# EAGLE board CT_schematic (EAGLE 7.6.0)

Size 100 x 80 mm. Coordinates in mm from the lower left corner, seen from the top.
Outline: 0,0 100,0 100,80 0,80 0,0
Copper layers (1*16): Top 0.035mm / dielectric 1.5mm / Bottom 0.035mm
Design rules "default": minimum track width 10mil, minimum drill 24mil, track to track 8mil, track to pad 8mil, pad to pad 8mil, via to via 8mil, smd to smd 8mil, copper to edge 40mil, drill to drill 8mil, minimum pad ring 10mil, minimum via ring 8mil, stop-mask expansion 4mil, vias tented up to drill 0mil, thermal gap 10mil

## Footprints (pad centres in the part's own frame; a part is rotated, then mirrored left to right if it is on the bottom)
C0603 = smd 0.8 x 0.8: 1 -0.762,0; 2 0.762,0
C0402 = smd 0.5 x 0.5: 1 -0.508,0; 2 0.508,0
C1210 = smd 1.2 x 2.5: 1 -1.524,0; 2 1.524,0
C0805 = smd 1.2 x 1.3: 1 -1.016,0; 2 1.016,0
2220 = smd 1.85 x 5.5: 1 -2.55,0; 2 2.55,0
R0603 = smd 0.8 x 0.8: 1 -0.762,0; 2 0.762,0
EXV-9H = smd 3.505 x 1.676: 1 -2.857,0; 2 2.857,0
L0603 = smd 0.8 x 0.8: 1 -0.762,0; 2 0.762,0
DR1040 = smd 1.6 x 3.2: 1 -4.458,0; 2 4.458,0
PJ-037B_PACKAGE = drill 3.7 square: 1 12,0 | drill 3.2 square: 2 6,0
UFBGA144 = smd 0.32 x 0.32: A1 -2.75,2.75; A2 -2.25,2.75; A3 -1.75,2.75; A4 -1.25,2.75; A5 -0.75,2.75; A6 -0.25,2.75; A7 0.25,2.75; A8 0.75,2.75; A9 1.25,2.75; A10 1.75,2.75; A11 2.25,2.75; A12 2.75,2.75; B1 -2.75,2.25; B2 -2.25,2.25; B3 -1.75,2.25; B4 -1.25,2.25; B5 -0.75,2.25; B6 -0.25,2.25; B7 0.25,2.25; B8 0.75,2.25; B9 1.25,2.25; B10 1.75,2.25; B11 2.25,2.25; B12 2.75,2.25; C1 -2.75,1.75; C2 -2.25,1.75; C3 -1.75,1.75; C4 -1.25,1.75; C5 -0.75,1.75; C6 -0.25,1.75; C7 0.25,1.75; C8 0.75,1.75; C9 1.25,1.75; C10 1.75,1.75; C11 2.25,1.75; C12 2.75,1.75; D1 -2.75,1.25; D2 -2.25,1.25; D3 -1.75,1.25; D4 -1.25,1.25; D5 -0.75,1.25; D6 -0.25,1.25; D7 0.25,1.25; D8 0.75,1.25; D9 1.25,1.25; D10 1.75,1.25; D11 2.25,1.25; D12 2.75,1.25; E1 -2.75,0.75; E2 -2.25,0.75; E3 -1.75,0.75; E4 -1.25,0.75; E5 -0.75,0.75; E6 -0.25,0.75; E7 0.25,0.75; E8 0.75,0.75; E9 1.25,0.75; E10 1.75,0.75; E11 2.25,0.75; E12 2.75,0.75; F1 -2.75,0.25; F2 -2.25,0.25; F3 -1.75,0.25; F4 -1.25,0.25; F5 -0.75,0.25; F6 -0.25,0.25; F7 0.25,0.25; F8 0.75,0.25; F9 1.25,0.25; F10 1.75,0.25; F11 2.25,0.25; F12 2.75,0.25; G1 -2.75,-0.25; G2 -2.25,-0.25; G3 -1.75,-0.25; G4 -1.25,-0.25; G5 -0.75,-0.25; G6 -0.25,-0.25; G7 0.25,-0.25; G8 0.75,-0.25; G9 1.25,-0.25; G10 1.75,-0.25; G11 2.25,-0.25; G12 2.75,-0.25; H1 -2.75,-0.75; H2 -2.25,-0.75; H3 -1.75,-0.75; H4 -1.25,-0.75; H5 -0.75,-0.75; H6 -0.25,-0.75; H7 0.25,-0.75; H8 0.75,-0.75; H9 1.25,-0.75; H10 1.75,-0.75; H11 2.25,-0.75; H12 2.75,-0.75; J1 -2.75,-1.25; J2 -2.25,-1.25; J3 -1.75,-1.25; J4 -1.25,-1.25; J5 -0.75,-1.25; J6 -0.25,-1.25; J7 0.25,-1.25; J8 0.75,-1.25; J9 1.25,-1.25; J10 1.75,-1.25; J11 2.25,-1.25; J12 2.75,-1.25; K1 -2.75,-1.75; K2 -2.25,-1.75; K3 -1.75,-1.75; K4 -1.25,-1.75; K5 -0.75,-1.75; K6 -0.25,-1.75; K7 0.25,-1.75; K8 0.75,-1.75; K9 1.25,-1.75; K10 1.75,-1.75; K11 2.25,-1.75; K12 2.75,-1.75; L1 -2.75,-2.25; L2 -2.25,-2.25; L3 -1.75,-2.25; L4 -1.25,-2.25; L5 -0.75,-2.25; L6 -0.25,-2.25; L7 0.25,-2.25; L8 0.75,-2.25; L9 1.25,-2.25; L10 1.75,-2.25; L11 2.25,-2.25; L12 2.75,-2.25; M1 -2.75,-2.75; M2 -2.25,-2.75; M3 -1.75,-2.75; M4 -1.25,-2.75; M5 -0.75,-2.75; M6 -0.25,-2.75; M7 0.25,-2.75; M8 0.75,-2.75; M9 1.25,-2.75; M10 1.75,-2.75; M11 2.25,-2.75; M12 2.75,-2.75
SOT-23-6 = smd 1.1 x 0.6: 1 -1.4,0.95; 2 -1.4,0; 3 -1.4,-0.95; 4 1.4,-0.95; 5 1.4,0; 6 1.4,0.95
WSON-8-PAD = smd 0.45 x 0.7: 1 -0.75,-0.95; 2 0.52,-0.95; 3 1.79,-0.95; 4 3.06,-0.95; 5 3.06,4.35; 6 1.79,4.35; 7 0.52,4.35; 8 -0.75,4.35 | smd 4 x 3.5: PAD 1.15,1.7
PC28F512P33BFD = smd 0.45 x 0.45: A1 0,0; A2 1,0; A3 2,0; A4 3,0; A5 4,0; A6 5,0; A7 6,0; A8 7,0; B1 0,-1; B2 1,-1; B3 2,-1; B4 3,-1; B5 4,-1; B6 5,-1; B7 6,-1; B8 7,-1; C1 0,-2; C2 1,-2; C3 2,-2; C4 3,-2; C5 4,-2; C6 5,-2; C7 6,-2; C8 7,-2; D1 0,-3; D2 1,-3; D3 2,-3; D4 3,-3; D5 4,-3; D6 5,-3; D7 6,-3; D8 7,-3; E1 0,-4; E2 1,-4; E3 2,-4; E4 3,-4; E5 4,-4; E6 5,-4; E7 6,-4; E8 7,-4; F1 0,-5; F2 1,-5; F3 2,-5; F4 3,-5; F5 4,-5; F6 5,-5; F7 6,-5; F8 7,-5; G1 0,-6; G2 1,-6; G3 2,-6; G4 3,-6; G5 4,-6; G6 5,-6; G7 6,-6; G8 7,-6; H1 0,-7; H2 1,-7; H3 2,-7; H4 3,-7; H5 4,-7; H6 5,-7; H7 6,-7; H8 7,-7
QFN-32 = smd 0.6 x 0.3: 1 -2.3,1.75; 2 -2.3,1.25; 3 -2.3,0.75; 4 -2.3,0.25; 5 -2.3,-0.25; 6 -2.3,-0.75; 7 -2.3,-1.25; 8 -2.3,-1.75; 17 2.3,-1.75; 18 2.3,-1.25; 19 2.3,-0.75; 20 2.3,-0.25; 21 2.3,0.25; 22 2.3,0.75; 23 2.3,1.25; 24 2.3,1.75 | smd 0.3 x 0.6: 9 -1.75,-2.3; 10 -1.25,-2.3; 11 -0.75,-2.3; 12 -0.25,-2.3; 13 0.25,-2.3; 14 0.75,-2.3; 15 1.25,-2.3; 16 1.75,-2.3; 25 1.75,2.3; 26 1.25,2.3; 27 0.75,2.3; 28 0.25,2.3; 29 -0.25,2.3; 30 -0.75,2.3; 31 -1.25,2.3; 32 -1.75,2.3 | smd 3.2 x 3.2: EXP 0,0
SJ-43515TS-SMT-TR = smd 2.2 x 3: 1 0.6,-7.4; 4 3.4,-7.4 | smd 3 x 3: 2 12.8,-7.4; 5 17,-3 | smd 2 x 3: 3 5.3,0; 6 2.5,0 | drill 1.8: P$7 4.5,-3.69; P$8 11.54,-3.69
WM-64PC = drill 0.6 pad 1: 1 -1,0.95; 2 -1,-0.95
MICRO_USB_AB = smd 0.4 x 1.35: 1 1.3,0.26; 2 0.65,0.26; 3 0,0.26; 4 -0.65,0.26; 5 -1.3,0.26 | drill 0.6 pad 0.95 long: 6 4.175,-2.54; 7 -4.175,-2.54 | drill 0.7 pad 1.1 long: 8 -2.225,0.46; 9 2.225,0.46
SOT143B = smd 1 x 0.7: 1 -0.75,-1 | smd 0.6 x 0.7: 2 0.95,-1; 3 0.95,1; 4 -0.95,1
FCI_10118193-0001LF = smd 0.4 x 1.35: 1 -1.3,2.675; 2 -0.65,2.675; 3 0,2.675; 4 0.65,2.675; 5 1.3,2.675 | smd 1.6 x 1.4: 6 -3.2,2.45; 7 3.2,2.45 | smd 1.9 x 1.9: 8 -1.2,0; 9 1.2,0 | hole 0.5: -3.3,0; 3.3,0
ABS07-32.768KHZ-7-T = smd 1.1 x 2.4: 1 -2.5,0; 2 0,0
ASFL1 = smd 1.7 x 1.5: 1 -1.27,-1.1; 2 1.27,-1.1; 3 1.27,1.1; 4 -1.27,1.1
WSON-8 = smd 0.3 x 0.6: 1 -0.75,0; 2 0.05,0; 3 0.85,0; 4 1.65,0; 5 1.65,3.8; 6 0.85,3.8; 7 0.05,3.8; 8 -0.75,3.8 | smd 3 x 2.6: PAD 0.45,1.9
QFN-16_EP = smd 0.805 x 0.3: 1 -1.452,0.75; 2 -1.452,0.25; 3 -1.452,-0.25; 4 -1.452,-0.75; 9 1.452,-0.75; 10 1.452,-0.25; 11 1.452,0.25; 12 1.452,0.75 | smd 0.3 x 0.805: 5 -0.75,-1.452; 6 -0.25,-1.452; 7 0.25,-1.452; 8 0.75,-1.452; 13 0.75,1.452; 14 0.25,1.452; 15 -0.25,1.452; 16 -0.75,1.452 | smd 1.55 x 1.55: 17 0,0
QFN-38_UHF = smd 0.75 x 0.3: 1 -2.4,2.75; 2 -2.4,2.25; 3 -2.4,1.75; 4 -2.4,1.25; 6 -2.4,0.25; 7 -2.4,-0.25; 8 -2.4,-0.75; 9 -2.4,-1.25; 10 -2.4,-1.75; 11 -2.4,-2.25; 12 -2.4,-2.75; 20 2.4,-2.75; 21 2.4,-2.25; 22 2.4,-1.75; 23 2.4,-1.25; 24 2.4,-0.75; 25 2.4,-0.25; 26 2.4,0.25; 27 2.4,0.75; 28 2.4,1.25; 29 2.4,1.75; 30 2.4,2.25; 31 2.4,2.75 | smd 0.758 x 0.3: 5 -2.4,0.75 | smd 0.3 x 0.75: 13 -1.5,-3.4; 14 -1,-3.4; 15 -0.5,-3.4; 16 0,-3.4; 17 0.5,-3.4; 18 1,-3.4; 19 1.5,-3.4; 32 1.5,3.4; 33 1,3.4; 34 0.5,3.4; 35 0,3.4; 36 -0.5,3.4; 37 -1,3.4; 38 -1.5,3.4 | smd 3.2 x 5.2: 39 0,0
IRF8306MTRPBF = smd 0.9 x 1.85: 1 0,0; 2 0,-2.35; 6 6.4,0; 7 6.4,-2.35 | smd 0.75 x 0.75: 3 1.75,-1.175 | smd 1.45 x 0.87: 4 3.5,-0.565; 5 3.5,-1.785
SW_4-1437565-2 = smd 1.4 x 2.1: 1 -2.23,4.55; 2 -2.23,-4.55; 3 2.23,4.55; 4 2.23,-4.55
LGM67K-G1J2-24-Z = smd 0.8 x 1.4: A -2,0; C 0,0
NC7SZ125M5X = smd 1.3 x 0.7: 1 -1.3,0.95; 2 -1.3,0; 3 -1.3,-0.95; 4 1.3,-0.95; 5 1.3,0.95

## Placement (x,y rotation side)
C1  1e-06  [C0603]  -41.91,80.01 0 top  (outside the outline)
C2  1e-07  [C0603]  -45.72,80.01 0 top  (outside the outline)
C3  1e-07  [C0603]  -49.53,80.01 0 top  (outside the outline)
C4  1e-07  [C0603]  -53.34,80.01 0 top  (outside the outline)
C5  1e-07  [C0603]  -57.15,80.01 0 top  (outside the outline)
C6  1e-07  [C0603]  -60.96,80.01 0 top  (outside the outline)
C7  1e-07  [C0603]  -64.77,80.01 0 top  (outside the outline)
C8  1e-07  [C0603]  -68.58,80.01 0 top  (outside the outline)
C9  1e-07  [C0603]  -72.39,80.01 0 top  (outside the outline)
C10  1e-07  [C0603]  -76.2,80.01 0 top  (outside the outline)
C11  1e-07  [C0603]  -80.01,80.01 0 top  (outside the outline)
C12  1e-07  [C0603]  -83.82,80.01 0 top  (outside the outline)
C13  1e-07  [C0603]  -87.63,80.01 0 top  (outside the outline)
C14  4.7e-06  [C0603]  -34.29,80.01 0 top  (outside the outline)
C15  1e-08  [C0603]  -91.44,80.01 0 top  (outside the outline)
C16  1e-06  [C0603]  -15.24,85.09 0 top  (outside the outline)
C17  1e-07  [C0603]  -19.05,85.09 0 top  (outside the outline)
C18  1e-07  [C0603]  -22.86,85.09 0 top  (outside the outline)
C19  1e-07  [C0603]  -26.67,85.09 0 top  (outside the outline)
C20  1e-11  [C0402]  -45.72,90.17 0 top  (outside the outline)
C21  1e-11  [C0402]  -49.53,90.17 0 top  (outside the outline)
C23  1e-06  [C0603]  -30.48,85.09 0 top  (outside the outline)
C24  1e-07  [C0402]  -53.34,90.17 0 top  (outside the outline)
C25  1e-08  [C0402]  -57.15,90.17 0 top  (outside the outline)
C26  1e-07  [C0402]  -60.96,90.17 0 top  (outside the outline)
C27  1e-08  [C0402]  -64.77,90.17 0 top  (outside the outline)
C28  1e-07  [C0402]  -68.58,90.17 0 top  (outside the outline)
C29  1e-08  [C0402]  -72.39,90.17 0 top  (outside the outline)
C30  1e-06  [C0603]  -34.29,85.09 0 top  (outside the outline)
C31  1e-06  [C0603]  -38.1,85.09 0 top  (outside the outline)
C32  1e-06  [C0603]  -41.91,85.09 0 top  (outside the outline)
C33  1e-06  [C0603]  -45.72,85.09 0 top  (outside the outline)
C34  1e-06  [C0603]  -49.53,85.09 0 top  (outside the outline)
C35  1e-06  [C0603]  -53.34,85.09 0 top  (outside the outline)
C36  1e-06  [C0603]  -57.15,85.09 0 top  (outside the outline)
C37  1e-07  [C0402]  -76.2,90.17 0 top  (outside the outline)
C38  1e-07  [C0402]  -80.01,90.17 0 top  (outside the outline)
C39  1e-07  [C0402]  -83.82,90.17 0 top  (outside the outline)
C40  1e-07  [C0402]  -87.63,90.17 0 top  (outside the outline)
C41  1e-06  [C0603]  -60.96,85.09 0 top  (outside the outline)
C42  1e-08  [C0402]  -91.44,90.17 0 top  (outside the outline)
C43  1e-08  [C0402]  -95.25,90.17 0 top  (outside the outline)
C44  1e-08  [C0402]  -15.24,95.25 0 top  (outside the outline)
C45  1e-05  [C1210]  -48.26,62.23 0 top  (outside the outline)
C46  1e-05  [C0805]  -15.24,69.85 0 top  (outside the outline)
C47  1e-05  [C0805]  -20.32,69.85 0 top  (outside the outline)
C48  1e-06  [C0603]  -64.77,85.09 0 top  (outside the outline)
C49  1e-07  [C0402]  -19.05,95.25 0 top  (outside the outline)
C50  6.8e-05  [2220]  -16.51,44.45 0 top  (outside the outline)
C51  1e-08  [C0402]  -22.86,95.25 0 top  (outside the outline)
C52  1e-05  [C1210]  -54.61,62.23 0 top  (outside the outline)
C53  1e-05  [C1210]  -60.96,62.23 0 top  (outside the outline)
C54  1e-08  [C0402]  -26.67,95.25 0 top  (outside the outline)
C55  1e-05  [C1210]  -67.31,62.23 0 top  (outside the outline)
C56  1e-05  [C0805]  -25.4,69.85 0 top  (outside the outline)
C57  1e-07  [C0402]  -30.48,95.25 0 top  (outside the outline)
C58  2.2e-06  [C0603]  -38.1,80.01 0 top  (outside the outline)
C59  2.45e-08  [R0603]  -73.66,69.85 0 top  (outside the outline)
C60  2.8258362168397e-09  [R0603]  -35.56,69.85 0 top  (outside the outline)
C61  7.105e-09  [R0603]  -48.26,69.85 0 top  (outside the outline)
C62  0.0001  [EXV-9H]  -72.39,53.34 0 top  (outside the outline)
C63  0.0001  [EXV-9H]  -83.82,53.34 0 top  (outside the outline)
C64  1e-08  [C0402]  -34.29,95.25 0 top  (outside the outline)
C65  1e-08  [C0402]  -38.1,95.25 0 top  (outside the outline)
C66  1e-08  [C0402]  -41.91,95.25 0 top  (outside the outline)
F1  240.0  [L0603]  -68.58,85.09 0 top  (outside the outline)
I1  5.2e-06  [DR1040]  -34.29,34.29 0 top  (outside the outline)
J1  PJ-037B  [PJ-037B_PACKAGE]  -27.94,21.59 0 top  (outside the outline)
R2  1000.0  [R0603]  -72.39,85.09 0 top  (outside the outline)
R7  4700.0  [R0603]  -76.2,85.09 0 top  (outside the outline)
R8  4700.0  [R0603]  -80.01,85.09 0 top  (outside the outline)
R9  4700.0  [R0603]  -83.82,85.09 0 top  (outside the outline)
R10  47000.0  [R0603]  -78.74,69.85 0 top  (outside the outline)
R11  10000.0  [R0603]  -83.82,69.85 0 top  (outside the outline)
R12  10000.0  [R0603]  -88.9,69.85 0 top  (outside the outline)
R13  10000.0  [R0603]  -93.98,69.85 0 top  (outside the outline)
R14  10000.0  [R0603]  -15.24,74.93 0 top  (outside the outline)
R15  10000.0  [R0603]  -20.32,74.93 0 top  (outside the outline)
R16  10000.0  [R0603]  -25.4,74.93 0 top  (outside the outline)
R17  10000.0  [R0603]  -30.48,74.93 0 top  (outside the outline)
R18  10000.0  [R0603]  -35.56,74.93 0 top  (outside the outline)
R19  10000.0  [R0603]  -40.64,74.93 0 top  (outside the outline)
R20  10000.0  [R0603]  -45.72,74.93 0 top  (outside the outline)
R21  10000.0  [R0603]  -50.8,74.93 0 top  (outside the outline)
R22  10000.0  [R0603]  -55.88,74.93 0 top  (outside the outline)
R23  1270.0  [R0603]  -87.63,85.09 0 top  (outside the outline)
R24  1270.0  [R0603]  -91.44,85.09 0 top  (outside the outline)
R25  100000.0  [R0603]  -53.34,69.85 0 top  (outside the outline)
R26  200.0  [R0603]  -15.24,90.17 0 top  (outside the outline)
R27  1000.0  [R0603]  -19.05,90.17 0 top  (outside the outline)
R28  20000.0  [R0603]  -60.96,74.93 0 top  (outside the outline)
R29  91000.0  [R0603]  -66.04,74.93 0 top  (outside the outline)
R30  300000.0  [R0603]  -58.42,69.85 0 top  (outside the outline)
R31  100000.0  [R0603]  -63.5,69.85 0 top  (outside the outline)
R32  3900.0  [R0603]  -22.86,90.17 0 top  (outside the outline)
R33  1000.0  [R0603]  -26.67,90.17 0 top  (outside the outline)
R34  100000.0  [R0603]  -68.58,69.85 0 top  (outside the outline)
R35  200.0  [R0603]  -30.48,90.17 0 top  (outside the outline)
R36  1000.0  [R0603]  -34.29,90.17 0 top  (outside the outline)
R37  10000.0  [R0603]  -71.12,74.93 0 top  (outside the outline)
R38  75000.0  [R0603]  -76.2,74.93 0 top  (outside the outline)
R39  10000.0  [R0603]  -81.28,74.93 0 top  (outside the outline)
R40  10000.0  [R0603]  -86.36,74.93 0 top  (outside the outline)
R41  95300.0  [R0603]  -91.44,74.93 0 top  (outside the outline)
R42  95300.0  [R0603]  -15.24,80.01 0 top  (outside the outline)
R43  10000.0  [R0603]  -20.32,80.01 0 top  (outside the outline)
R44  10000.0  [R0603]  -25.4,80.01 0 top  (outside the outline)
R45  10000.0  [R0603]  -30.48,80.01 0 top  (outside the outline)
R46  120272.72727273  [R0603]  -43.18,69.85 0 top  (outside the outline)
U1  STM32F446ZCH6  [UFBGA144]  -24.13,34.29 0 top  (outside the outline)
U2  MAX4995AAUT+T  [SOT-23-6]  -72.39,60.96 0 top  (outside the outline)
U3  MX25R6435FZAIH0  [WSON-8-PAD]  -92.71,19.05 0 top  (outside the outline)
U4  PC28F512P33BFD  [PC28F512P33BFD]  -44.45,25.4 0 top  (outside the outline)
U5  SGTL5000XNAA3  [QFN-32]  -60.96,34.29 0 top  (outside the outline)
U6  SJ-43515TS-SMT-TR  [SJ-43515TS-SMT-TR]  -39.37,10.16 0 top  (outside the outline)
U7  SJ-43515TS-SMT-TR  [SJ-43515TS-SMT-TR]  -67.31,10.16 0 top  (outside the outline)
U8  SJ-43515TS-SMT-TR  [SJ-43515TS-SMT-TR]  -95.25,10.16 0 top  (outside the outline)
U9  WM-64PCT  [WM-64PC]  -46.99,34.29 0 top  (outside the outline)
U10  47590-0001  [MICRO_USB_AB]  -53.34,22.86 0 top  (outside the outline)
U11  prtr5v0u2ax  [SOT143B]  -54.61,95.25 0 top  (outside the outline)
U12  10118193-0001LF  [FCI_10118193-0001LF]  -53.34,53.34 0 top  (outside the outline)
U13  prtr5v0u2ax  [SOT143B]  -67.31,95.25 0 top  (outside the outline)
U14  ABS07-32.768KHZ-7-T  [ABS07-32.768KHZ-7-T]  -27.94,63.5 0 top  (outside the outline)
U15  ASFL-24.57MHZ-NCS  [ASFL1]  -27.94,54.61 0 top  (outside the outline)
U16  ASFL1-25MHZ-NCS  [ASFL1]  -44.45,54.61 0 top  (outside the outline)
U17  LP3878SDX-ADJ/NOPB  [WSON-8]  -38.1,43.18 0 top  (outside the outline)
U18  LTC3601EUD#PBF  [QFN-16_EP]  -39.37,90.17 0 top  (outside the outline)
U19  LP3878SDX-ADJ/NOPB  [WSON-8]  -58.42,43.18 0 top  (outside the outline)
U20  LP3878SDX-ADJ/NOPB  [WSON-8]  -78.74,43.18 0 top  (outside the outline)
U21  LTC2928CUHF#PBF  [QFN-38_UHF]  -62.23,53.34 0 top  (outside the outline)
U22  IRF8306MTRPbF  [IRF8306MTRPBF]  -78.74,34.29 0 top  (outside the outline)
U23  IRF8306MTRPbF  [IRF8306MTRPBF]  -93.98,34.29 0 top  (outside the outline)
U24  4-1437565-2  [SW_4-1437565-2]  -73.66,21.59 0 top  (outside the outline)
U25  Q65110A2395  [LGM67K-G1J2-24-Z]  -36.83,62.23 0 top  (outside the outline)
U26  nc7sz125m5x  [NC7SZ125M5X]  -77.47,60.96 0 top  (outside the outline)
U27  nc7sz125m5x  [NC7SZ125M5X]  -83.82,60.96 0 top  (outside the outline)
U28  nc7sz125m5x  [NC7SZ125M5X]  -90.17,60.96 0 top  (outside the outline)

## Library data of the parts
C1-C21 C23-C66 F1 I1 J1 R2 R7-R46 U1-U28 = circuit_tree

## Nets
CLK_CRYSTAL_U1_B1: C20.1 U1.B1 U14.1
CLK_CRYSTAL_U1_C1: C21.1 U1.C1 U14.2
CLK_U1_D1: U1.D1 U16.3
CLK_U5_21: U5.21 U15.3
GND: C1.2 C2.2 C3.2 C4.2 C5.2 C6.2 C7.2 C8.2 C9.2 C10.2 C11.2 C12.2 C13.2 C14.2 C15.2 C16.2 C17.2 C18.2 C19.2 C20.2 C21.2 C23.2 C24.2 C25.2 C26.2 C27.2 C28.2 C29.2 C37.2 C38.2 C39.2 C40.2 C41.2 C42.2 C43.2 C44.2 C45.2 C46.2 C47.2 C48.2 C50.1 C50.2 C51.2 C52.2 C53.2 C54.2 C55.2 C56.2 C57.2 C58.2 C59.2 C60.2 C61.2 C62.2 C63.2 C64.2 C65.2 C66.2 J1.2 R2.2 R10.2 R11.2 R15.2 R24.2 R27.2 R28.2 R30.2 R33.2 R36.2 R38.2 R41.2 R42.2 R43.2 R44.2 R45.2 U1.D2 U1.E6 U1.E7 U1.G4 U1.G8 U1.G10 U1.H6 U1.J1 U1.K1 U2.2 U3.4 U3.PAD U4.B2 U4.H2 U4.H4 U4.H6 U5.1 U5.3 U5.7 U5.EXP U7.1 U8.1 U9.2 U10.5 U10.6 U10.7 U10.8 U10.9 U11.1 U12.5 U12.6 U12.7 U12.8 U12.9 U13.1 U15.2 U16.2 U17.3 U17.PAD U18.1 U18.9 U18.17 U19.3 U19.PAD U20.3 U20.PAD U21.8 U21.9 U21.10 U21.12 U21.13 U21.24 U21.25 U21.30 U21.32 U21.39 U25.C U26.1 U26.3 U27.1 U27.3 U28.1 U28.3
NET_U1_D5: R11.1 U1.D5
NET_U1_E5: R12.1 U1.E5
NET_U1_F1: R9.1 U1.F1 U28.4
NET_U1_G9: C19.1 U1.G9
NET_U1_H5: R13.1 U1.H5
NET_U1_M1: C15.1 C16.1 F1.1 U1.L1 U1.M1
NET_U1_M10: U25.A
NET_U1_M11: U24.3 U24.4
NET_U2_3: R10.1 U2.3
NET_U3_7: R7.1 U1.F3 U3.7 U26.4
NET_U4_A4: C28.1 C29.1 U4.A4
NET_U4_C6: R21.1 U4.C6
NET_U4_D4: R8.1 U4.D4 U27.4
NET_U5_10: C40.1 U5.10
NET_U5_29: R23.1 U5.29
NET_U5_31: R24.1 U5.31
NET_U6_1: U5.4 U6.1
NET_U6_2: U5.2 U6.2
NET_U6_5: U5.6 U6.5
NET_U7_2: C31.1 U7.2
NET_U7_5: C30.1 U7.5
NET_U7_11: C31.2
NET_U7_12: C30.2
NET_U8_2: C33.1 C34.1 U8.2
NET_U8_5: C32.1 U8.5
NET_U8_13: C33.2 C34.2
NET_U8_14: C32.2
NET_U9_1: C35.1 C36.1 C41.1 U5.16 U9.1
NET_U9_15: C35.2 C36.2
NET_U17_1: C44.1 U17.1
NET_U17_6: R26.2 R27.1 U17.6
NET_U17_8: R25.1 U17.8
NET_U18_3: C49.2 I1.1 U18.3 U18.4
NET_U18_6: C49.1 U18.6
NET_U18_7: C48.1 U18.7 U18.12
NET_U18_10: R30.1 U18.10
NET_U18_11: R28.1 R29.1 U18.11
NET_U18_14: U18.14
NET_U18_ATNET_3: I1.2 R29.2
NET_U19_1: C51.1 U19.1
NET_U19_6: R32.2 R33.1 U19.6
NET_U19_8: R31.1 U19.8
NET_U20_1: C54.1 U20.1
NET_U20_6: R35.2 R36.1 U20.6
NET_U20_8: R34.1 U20.8
NET_U21_3: R44.1 U21.3
NET_U21_6: R41.1 U21.6
NET_U21_7: R42.1 U21.7
NET_U21_16: R43.1 R46.1 U21.16
NET_U21_18: R40.1 U21.18
NET_U21_19: R39.1 U21.19 U21.20
NET_U21_21: R37.1 R38.1 U21.21 U26.2 U27.2 U28.2
NET_U21_22: C57.1 R37.2 R39.2 R40.2 U21.11 U21.22
NET_U21_26: C60.1 U21.26
NET_U21_27: C59.1 U21.27
NET_U21_28: C61.1 U21.28
NET_U21_38: R45.1 U21.38
NET_U22_3: U21.2 U22.3
NET_U23_3: U21.37 U23.3
NET_U24_1: R2.1 U24.1 U24.2
PROC_FMC_A0: U1.C3 U4.A1
PROC_FMC_A1: U1.C4 U4.B1
PROC_FMC_A2: U1.D4 U4.C1
PROC_FMC_A3: U1.E2 U4.D1
PROC_FMC_A4: U1.E3 U4.D2
PROC_FMC_A5: U1.E4 U4.A2
PROC_FMC_A6: U1.L5 U4.C2
PROC_FMC_A7: U1.K5 U4.A3
PROC_FMC_A8: U1.M6 U4.B3
PROC_FMC_A9: U1.L6 U4.C3
PROC_FMC_A10: U1.K6 U4.D3
PROC_FMC_A11: U1.J6 U4.C4
PROC_FMC_A12: U1.J12 U4.A5
PROC_FMC_A13: U1.J11 U4.B5
PROC_FMC_A14: U1.J10 U4.C5
PROC_FMC_A15: U1.H12 U4.D7
PROC_FMC_A16: U1.H9 U4.D8
PROC_FMC_A17: U1.L10 U4.A7
PROC_FMC_A18: U1.K10 U4.B7
PROC_FMC_A19: U1.A2 U4.C7
PROC_FMC_A20: U1.B2 U4.C8
PROC_FMC_A21: U1.B3 U4.A8
PROC_FMC_A22: U1.B4 U4.G1
PROC_FMC_A23: U1.A3 U4.H8
PROC_FMC_A24: U1.D7 U4.B6
PROC_FMC_CLK: U1.D9 U4.E6
PROC_FMC_D0: U1.K11 U4.F2
PROC_FMC_D1: U1.K12 U4.E2
PROC_FMC_D2: U1.E10 U4.G3
PROC_FMC_D3: U1.D10 U4.E4
PROC_FMC_D4: U1.M7 U4.E5
PROC_FMC_D5: U1.L7 U4.G5
PROC_FMC_D6: U1.K7 U4.G6
PROC_FMC_D7: U1.J7 U4.H7
PROC_FMC_D8: U1.H8 U4.E1
PROC_FMC_D9: U1.J8 U4.E3
PROC_FMC_D10: U1.K8 U4.F3
PROC_FMC_D11: U1.L8 U4.F4
PROC_FMC_D12: U1.M8 U4.F5
PROC_FMC_D13: U1.L9 U4.H5
PROC_FMC_D14: U1.K9 U4.G7
PROC_FMC_D15: U1.J9 U4.E7
PROC_FMC_NE2: R19.1 U1.E8 U4.B4
PROC_FMC_NL: R18.1 U1.D6 U4.F6
PROC_FMC_NOE: R20.1 U1.C9 U4.F8
PROC_FMC_NWAIT: U1.A8 U4.F7
PROC_FMC_NWE: R22.1 U1.B9 U4.G8
PROC_GPIO_TO_U1_USB_FAULT: R14.1 U1.A4 U2.6
PROC_GPIO_TO_U1_VBUS_EN: R15.1 U1.A1 U2.4
PROC_I2S1_CK: U1.A7 U5.24
PROC_I2S1_SD: U1.B6 U5.26
PROC_I2S1_WS: U1.A10 U5.23
PROC_QUADSPI_BK1_IO0: U1.E11 U3.5
PROC_QUADSPI_BK1_IO1: U1.B11 U3.2
PROC_QUADSPI_BK1_IO2: R17.1 U1.F2 U3.3
PROC_QUADSPI_BK1_NCS: R16.1 U1.C6 U3.1
PROC_QUADSPI_CLK: U1.J5 U3.6
PROC_USB_OTG_FS_DM: U1.C12 U10.2 U11.3
PROC_USB_OTG_FS_DP: U1.B12 U10.3 U11.2
PROC_USB_OTG_FS_ID: U1.D11 U10.4
PROC_USB_OTG_FS_VBUS: U1.D12 U2.1 U10.1 U11.4
PROC_USB_OTG_HS_DM: U12.2 U13.3
PROC_USB_OTG_HS_DP: U12.3 U13.2
PROC_USB_OTG_HS_VBUS: U12.1 U13.4
VCC_14V6: C58.1 C62.1 C63.1 J1.1 R46.2 U21.23 U22.1 U22.2 U22.6 U22.7 U23.1 U23.2 U23.6 U23.7
VCC_S1_14V6: C45.1 C47.1 C52.1 R25.2 R31.2 U17.4 U18.15 U18.16 U19.4 U22.4 U22.5
VCC_S2_14V6: C55.1 R34.2 U20.4 U23.4 U23.5
VCC_TIER1_1V2: C18.1 C37.1 C46.1 R26.1 U1.H7 U5.30 U17.5
VCC_TIER1_3V3: C1.1 C2.1 C3.1 C4.1 C5.1 C6.1 C7.1 C8.1 C9.1 C10.1 C11.1 C12.1 C13.1 C14.1 C17.1 C23.1 C24.1 C25.1 C26.1 C27.1 C38.1 C39.1 C42.1 C43.1 C50.2 C64.1 C65.1 C66.1 F1.2 I1.2 R7.2 R8.2 R9.2 R12.2 R13.2 R14.2 R16.2 R17.2 R18.2 R19.2 R20.2 R21.2 R22.2 R23.2 R29.2 U1.C2 U1.C11 U1.D3 U1.F4 U1.F5 U1.F6 U1.F7 U1.F8 U1.F9 U1.F10 U1.G5 U1.G6 U1.G7 U3.8 U4.A6 U4.D5 U4.D6 U4.G4 U4.H3 U5.5 U5.20 U15.4 U16.4 U18.8 U26.5 U27.5 U28.5
VCC_TIER1_5V0: C53.1 R32.1 U2.5 U19.5
VCC_TIER2_1V2: C56.1 R35.1 U20.5

## Tracks (layer width: path | path; a pad name or v marks a point on that pad's centre or on a via)
CLK_CRYSTAL_U1_B1  (2 unrouted)
CLK_CRYSTAL_U1_C1  (2 unrouted)
CLK_U1_D1  (1 unrouted)
CLK_U5_21  (1 unrouted)
GND  (137 unrouted)
NET_U1_D5  (1 unrouted)
NET_U1_E5  (1 unrouted)
NET_U1_F1  (2 unrouted)
NET_U1_G9  (1 unrouted)
NET_U1_H5  (1 unrouted)
NET_U1_M1  (4 unrouted)
NET_U1_M11  (1 unrouted)
NET_U2_3  (1 unrouted)
NET_U3_7  (3 unrouted)
NET_U4_A4  (2 unrouted)
NET_U4_C6  (1 unrouted)
NET_U4_D4  (2 unrouted)
NET_U5_10  (1 unrouted)
NET_U5_29  (1 unrouted)
NET_U5_31  (1 unrouted)
NET_U6_1  (1 unrouted)
NET_U6_2  (1 unrouted)
NET_U6_5  (1 unrouted)
NET_U7_2  (1 unrouted)
NET_U7_5  (1 unrouted)
NET_U8_2  (2 unrouted)
NET_U8_5  (1 unrouted)
NET_U8_13  (1 unrouted)
NET_U9_1  (4 unrouted)
NET_U9_15  (1 unrouted)
NET_U17_1  (1 unrouted)
NET_U17_6  (2 unrouted)
NET_U17_8  (1 unrouted)
NET_U18_3  (3 unrouted)
NET_U18_6  (1 unrouted)
NET_U18_7  (2 unrouted)
NET_U18_10  (1 unrouted)
NET_U18_11  (2 unrouted)
NET_U18_ATNET_3  (1 unrouted)
NET_U19_1  (1 unrouted)
NET_U19_6  (2 unrouted)
NET_U19_8  (1 unrouted)
NET_U20_1  (1 unrouted)
NET_U20_6  (2 unrouted)
NET_U20_8  (1 unrouted)
NET_U21_3  (1 unrouted)
NET_U21_6  (1 unrouted)
NET_U21_7  (1 unrouted)
NET_U21_16  (2 unrouted)
NET_U21_18  (1 unrouted)
NET_U21_19  (2 unrouted)
NET_U21_21  (5 unrouted)
NET_U21_22  (5 unrouted)
NET_U21_26  (1 unrouted)
NET_U21_27  (1 unrouted)
NET_U21_28  (1 unrouted)
NET_U21_38  (1 unrouted)
NET_U22_3  (1 unrouted)
NET_U23_3  (1 unrouted)
NET_U24_1  (2 unrouted)
PROC_FMC_A0  (1 unrouted)
PROC_FMC_A1  (1 unrouted)
PROC_FMC_A2  (1 unrouted)
PROC_FMC_A3  (1 unrouted)
PROC_FMC_A4  (1 unrouted)
PROC_FMC_A5  (1 unrouted)
PROC_FMC_A6  (1 unrouted)
PROC_FMC_A7  (1 unrouted)
PROC_FMC_A8  (1 unrouted)
PROC_FMC_A9  (1 unrouted)
PROC_FMC_A10  (1 unrouted)
PROC_FMC_A11  (1 unrouted)
PROC_FMC_A12  (1 unrouted)
PROC_FMC_A13  (1 unrouted)
PROC_FMC_A14  (1 unrouted)
PROC_FMC_A15  (1 unrouted)
PROC_FMC_A16  (1 unrouted)
PROC_FMC_A17  (1 unrouted)
PROC_FMC_A18  (1 unrouted)
PROC_FMC_A19  (1 unrouted)
PROC_FMC_A20  (1 unrouted)
PROC_FMC_A21  (1 unrouted)
PROC_FMC_A22  (1 unrouted)
PROC_FMC_A23  (1 unrouted)
PROC_FMC_A24  (1 unrouted)
PROC_FMC_CLK  (1 unrouted)
PROC_FMC_D0  (1 unrouted)
PROC_FMC_D1  (1 unrouted)
PROC_FMC_D2  (1 unrouted)
PROC_FMC_D3  (1 unrouted)
PROC_FMC_D4  (1 unrouted)
PROC_FMC_D5  (1 unrouted)
PROC_FMC_D6  (1 unrouted)
PROC_FMC_D7  (1 unrouted)
PROC_FMC_D8  (1 unrouted)
PROC_FMC_D9  (1 unrouted)
PROC_FMC_D10  (1 unrouted)
PROC_FMC_D11  (1 unrouted)
PROC_FMC_D12  (1 unrouted)
PROC_FMC_D13  (1 unrouted)
PROC_FMC_D14  (1 unrouted)
PROC_FMC_D15  (1 unrouted)
PROC_FMC_NE2  (2 unrouted)
PROC_FMC_NL  (2 unrouted)
PROC_FMC_NOE  (2 unrouted)
PROC_FMC_NWAIT  (1 unrouted)
PROC_FMC_NWE  (2 unrouted)
PROC_GPIO_TO_U1_USB_FAULT  (2 unrouted)
PROC_GPIO_TO_U1_VBUS_EN  (2 unrouted)
PROC_I2S1_CK  (1 unrouted)
PROC_I2S1_SD  (1 unrouted)
PROC_I2S1_WS  (1 unrouted)
PROC_QUADSPI_BK1_IO0  (1 unrouted)
PROC_QUADSPI_BK1_IO1  (1 unrouted)
PROC_QUADSPI_BK1_IO2  (2 unrouted)
PROC_QUADSPI_BK1_NCS  (2 unrouted)
PROC_QUADSPI_CLK  (1 unrouted)
PROC_USB_OTG_FS_DM  (2 unrouted)
PROC_USB_OTG_FS_DP  (2 unrouted)
PROC_USB_OTG_FS_ID  (1 unrouted)
PROC_USB_OTG_FS_VBUS  (3 unrouted)
PROC_USB_OTG_HS_DM  (1 unrouted)
PROC_USB_OTG_HS_DP  (1 unrouted)
PROC_USB_OTG_HS_VBUS  (1 unrouted)
VCC_14V6  (13 unrouted)
VCC_S1_14V6  (10 unrouted)
VCC_S2_14V6  (4 unrouted)
VCC_TIER1_1V2  (6 unrouted)
VCC_TIER1_3V3  (71 unrouted)
VCC_TIER1_5V0  (3 unrouted)
VCC_TIER2_1V2  (2 unrouted)